# EAGLE board VL6180_Sensor-Panel-v10 (EAGLE 6.5.0)
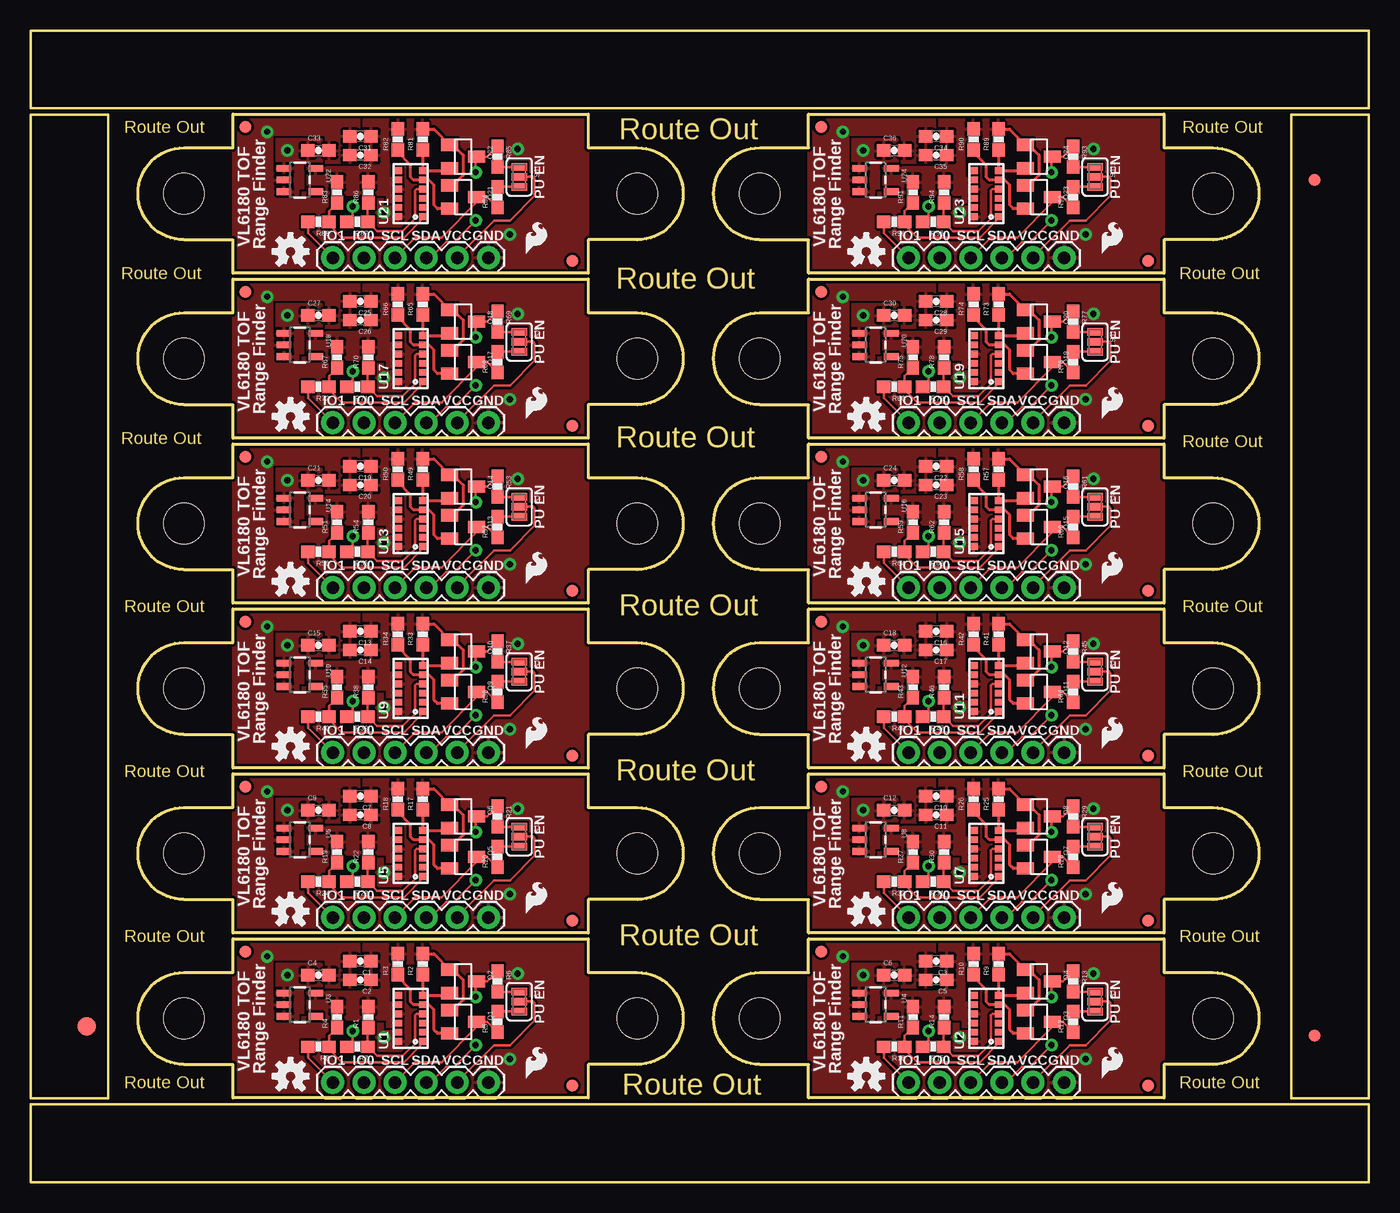
[diagram p0: board, top side]
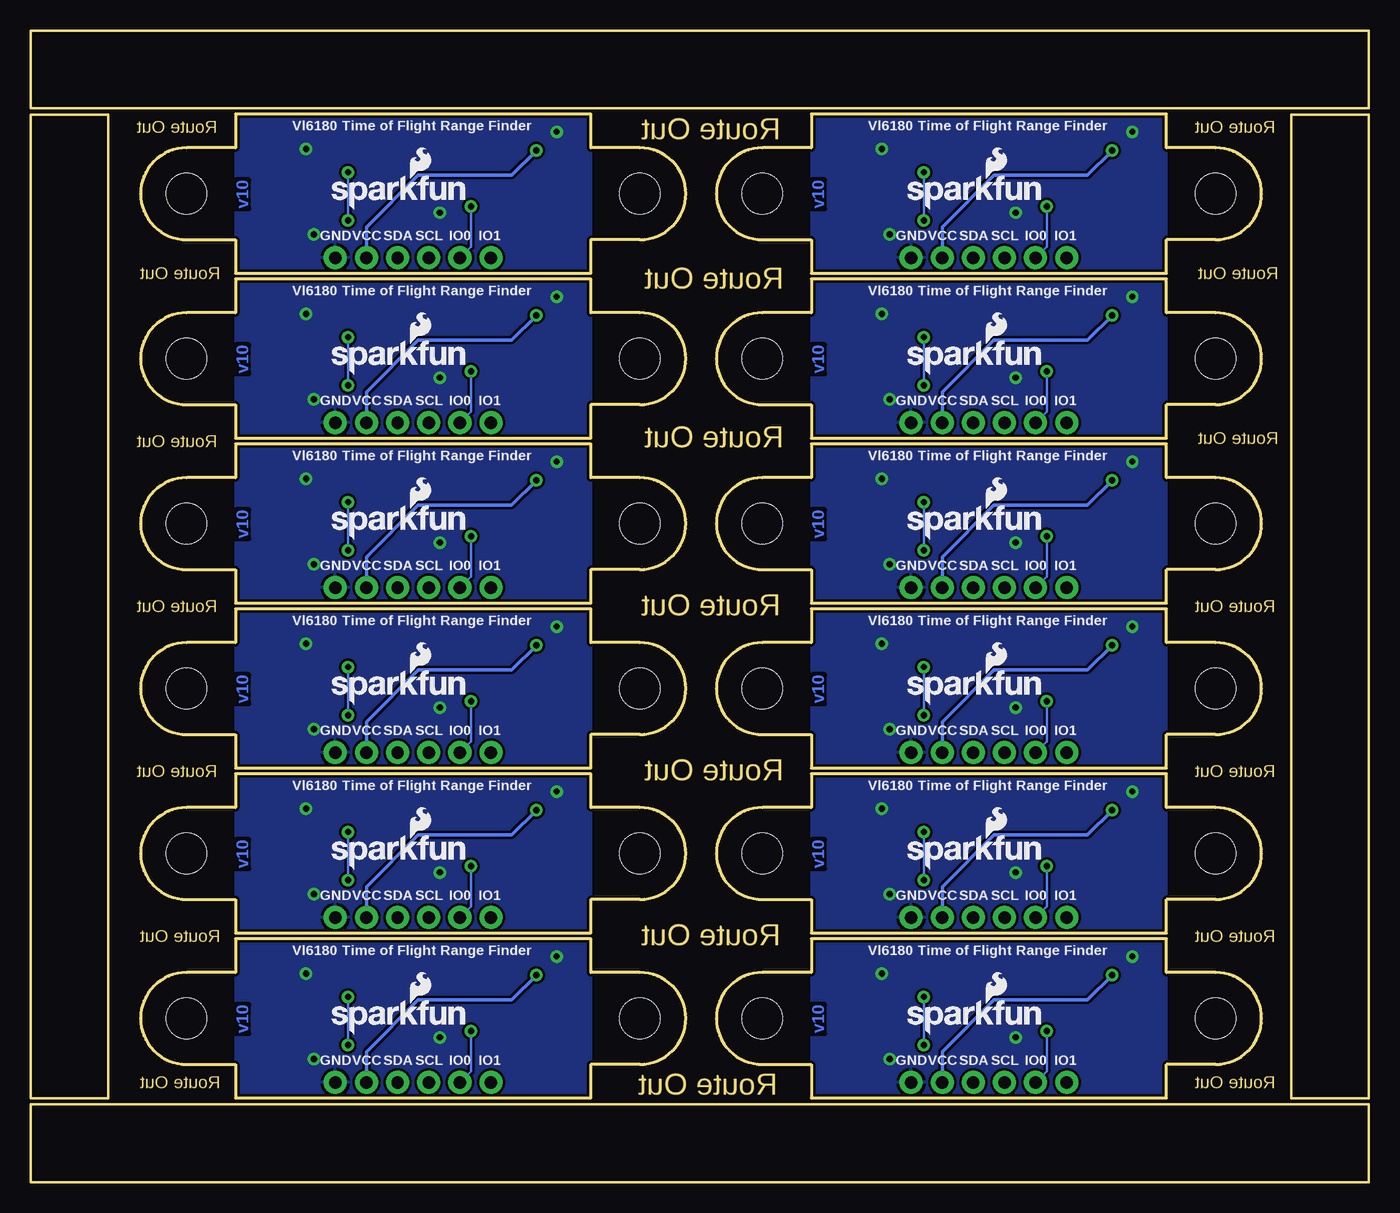
[diagram p1: board, bottom side, seen from below]

Size 109.22 x 93.98 mm. Coordinates in mm from the lower left corner, seen from the top.
Outline: 6.35,79.25 6.35,6.86 0,6.86 0,29.72
Outline: 79.25,0 0,0 0,6.35 29.72,6.35
Outline: 20.83,6.35 109.22,6.35 109.22,0 70.36,0
Outline: 109.22,79.25 109.22,6.86 102.87,6.86 102.87,29.72
Outline: 102.87,14.48 102.87,87.12 109.22,87.12 109.22,64.01
Outline: 0,14.48 0,87.12 6.35,87.12 6.35,64.01
Outline: 79.25,87.63 0,87.63 0,93.98 29.72,93.98
Outline: 28.7,93.98 109.22,93.98 109.22,87.63 78.23,87.63
Outline: 16.51,19.86 45.51,19.86 45.51,17.11 49.51,17.11 arc-180 49.51,9.61 45.51,9.61 45.51,6.86 16.51,6.86 16.51,9.61 12.51,9.61 arc-180 12.51,17.11 16.51,17.11 16.51,19.86
Outline: 63.5,19.86 92.5,19.86 92.5,17.11 96.5,17.11 arc-180 96.5,9.61 92.5,9.61 92.5,6.86 63.5,6.86 63.5,9.61 59.5,9.61 arc-180 59.5,17.11 63.5,17.11 63.5,19.86
Outline: 16.51,33.32 45.51,33.32 45.51,30.57 49.51,30.57 arc-180 49.51,23.07 45.51,23.07 45.51,20.32 16.51,20.32 16.51,23.07 12.51,23.07 arc-180 12.51,30.57 16.51,30.57 16.51,33.32
Outline: 63.5,33.32 92.5,33.32 92.5,30.57 96.5,30.57 arc-180 96.5,23.07 92.5,23.07 92.5,20.32 63.5,20.32 63.5,23.07 59.5,23.07 arc-180 59.5,30.57 63.5,30.57 63.5,33.32
Outline: 16.51,46.78 45.51,46.78 45.51,44.03 49.51,44.03 arc-180 49.51,36.53 45.51,36.53 45.51,33.78 16.51,33.78 16.51,36.53 12.51,36.53 arc-180 12.51,44.03 16.51,44.03 16.51,46.78
Outline: 63.5,46.78 92.5,46.78 92.5,44.03 96.5,44.03 arc-180 96.5,36.53 92.5,36.53 92.5,33.78 63.5,33.78 63.5,36.53 59.5,36.53 arc-180 59.5,44.03 63.5,44.03 63.5,46.78
Outline: 16.51,60.24 45.51,60.24 45.51,57.49 49.51,57.49 arc-180 49.51,49.99 45.51,49.99 45.51,47.24 16.51,47.24 16.51,49.99 12.51,49.99 arc-180 12.51,57.49 16.51,57.49 16.51,60.24
Outline: 63.5,60.24 92.5,60.24 92.5,57.49 96.5,57.49 arc-180 96.5,49.99 92.5,49.99 92.5,47.24 63.5,47.24 63.5,49.99 59.5,49.99 arc-180 59.5,57.49 63.5,57.49 63.5,60.24
Outline: 16.51,73.71 45.51,73.71 45.51,70.96 49.51,70.96 arc-180 49.51,63.46 45.51,63.46 45.51,60.71 16.51,60.71 16.51,63.46 12.51,63.46 arc-180 12.51,70.96 16.51,70.96 16.51,73.71
Outline: 63.5,73.71 92.5,73.71 92.5,70.96 96.5,70.96 arc-180 96.5,63.46 92.5,63.46 92.5,60.71 63.5,60.71 63.5,63.46 59.5,63.46 arc-180 59.5,70.96 63.5,70.96 63.5,73.71
Outline: 16.51,87.17 45.51,87.17 45.51,84.42 49.51,84.42 arc-180 49.51,76.92 45.51,76.92 45.51,74.17 16.51,74.17 16.51,76.92 12.51,76.92 arc-180 12.51,84.42 16.51,84.42 16.51,87.17
Outline: 63.5,87.17 92.5,87.17 92.5,84.42 96.5,84.42 arc-180 96.5,76.92 92.5,76.92 92.5,74.17 63.5,74.17 63.5,76.92 59.5,76.92 arc-180 59.5,84.42 63.5,84.42 63.5,87.17
Copper layers (1*16): Top 0.035mm / dielectric 1.5mm / Bottom 0.035mm
Design rules "SparkFun-2-layer": minimum track width 7mil, minimum drill 15mil, track to track 8mil, track to pad 8mil, pad to pad 8mil, via to via 8mil, smd to smd 8mil, copper to edge 8mil, drill to drill 8mil, minimum pad ring 12mil, minimum via ring 10mil, stop-mask expansion 4mil, vias tented up to drill 20mil, thermal gap 10mil

## Footprints (pad centres in the part's own frame; a part is rotated, then mirrored left to right if it is on the bottom)
0603-CAP = smd 1.1 x 1: 1 -0.85,0; 2 0.85,0
FIDUCIAL-1.5X3 = smd 1.5 x 1.5: 1 0,0
FIDUCIAL-1X2 = smd 1 x 1: 1 0,0
1X06 = drill 1.016 pad 1.88: 1 0,0; 2 2.54,0; 3 5.08,0; 4 7.62,0; 5 10.16,0; 6 12.7,0
SOT23 = smd 1 x 1.4: 1 -0.95,-1.1; 2 0.95,-1.1; 3 0,1.1
0603-RES = smd 1.1 x 1: 1 -0.85,0; 2 0.85,0
PAD-JUMPER-3-NC_BY_PASTE_YES_SILK_FULL_BOX = smd 0.635 x 1.27: 1 -0.813,0; 2 0,0; 3 0.813,0
STAND-OFF = hole 3.302: 0,0
VL6180 = smd 0.55 x 0.6: 1 -1.875,-1; 2 -1.125,-1; 3 -0.375,-1; 4 0.375,-1; 5 1.125,-1; 6 1.875,-1; 7 1.875,1; 8 1.125,1; 9 0.375,1; 10 -0.375,1; 11 -1.125,1; 12 -1.875,1
SOT23-5 = smd 0.55 x 1.2: 1 -0.95,-1.3; 2 0,-1.3; 3 0.95,-1.3; 4 0.95,1.3; 5 -0.95,1.3

## Placement (x,y rotation side)
C1  4.7uF  [0603-CAP]  26.92,18.03 180 top
C2  0.1uF  [0603-CAP]  26.92,16.51 180 top
C3  4.7uF  [0603-CAP]  73.91,18.03 180 top
C4  0.1uF  [0603-CAP]  23.5,16.89 0 top
C5  0.1uF  [0603-CAP]  73.91,16.51 180 top
C6  0.1uF  [0603-CAP]  70.48,16.89 0 top
C7  4.7uF  [0603-CAP]  26.92,31.5 180 top
C8  0.1uF  [0603-CAP]  26.92,29.97 180 top
C9  0.1uF  [0603-CAP]  23.5,30.35 0 top
C10  4.7uF  [0603-CAP]  73.91,31.5 180 top
C11  0.1uF  [0603-CAP]  73.91,29.97 180 top
C12  0.1uF  [0603-CAP]  70.48,30.35 0 top
C13  4.7uF  [0603-CAP]  26.92,44.96 180 top
C14  0.1uF  [0603-CAP]  26.92,43.43 180 top
C15  0.1uF  [0603-CAP]  23.5,43.81 0 top
C16  4.7uF  [0603-CAP]  73.91,44.96 180 top
C17  0.1uF  [0603-CAP]  73.91,43.43 180 top
C18  0.1uF  [0603-CAP]  70.48,43.81 0 top
C19  4.7uF  [0603-CAP]  26.92,58.42 180 top
C20  0.1uF  [0603-CAP]  26.92,56.9 180 top
C21  0.1uF  [0603-CAP]  23.5,57.28 0 top
C22  4.7uF  [0603-CAP]  73.91,58.42 180 top
C23  0.1uF  [0603-CAP]  73.91,56.9 180 top
C24  0.1uF  [0603-CAP]  70.48,57.28 0 top
C25  4.7uF  [0603-CAP]  26.92,71.88 180 top
C26  0.1uF  [0603-CAP]  26.92,70.36 180 top
C27  0.1uF  [0603-CAP]  23.5,70.74 0 top
C28  4.7uF  [0603-CAP]  73.91,71.88 180 top
C29  0.1uF  [0603-CAP]  73.91,70.36 180 top
C30  0.1uF  [0603-CAP]  70.48,70.74 0 top
C31  4.7uF  [0603-CAP]  26.92,85.34 180 top
C32  0.1uF  [0603-CAP]  26.92,83.82 180 top
C33  0.1uF  [0603-CAP]  23.5,84.2 0 top
C34  4.7uF  [0603-CAP]  73.91,85.34 180 top
C35  0.1uF  [0603-CAP]  73.91,83.82 180 top
C36  0.1uF  [0603-CAP]  70.48,84.2 0 top
E$1  [FIDUCIAL-1.5X3]  4.57,12.7 0 top
E$4  [FIDUCIAL-1X2]  104.78,11.94 0 top
E$5  [FIDUCIAL-1X2]  104.78,81.79 180 top
FID1  FIDUCIAL1X2  [FIDUCIAL-1X2]  17.53,18.8 0 top
FID2  FIDUCIAL1X2  [FIDUCIAL-1X2]  44.2,7.87 0 top
FID3  FIDUCIAL1X2  [FIDUCIAL-1X2]  64.52,18.8 0 top
FID4  FIDUCIAL1X2  [FIDUCIAL-1X2]  91.19,7.87 0 top
FID5  FIDUCIAL1X2  [FIDUCIAL-1X2]  17.53,32.26 0 top
FID6  FIDUCIAL1X2  [FIDUCIAL-1X2]  44.2,21.34 0 top
FID7  FIDUCIAL1X2  [FIDUCIAL-1X2]  64.52,32.26 0 top
FID8  FIDUCIAL1X2  [FIDUCIAL-1X2]  91.19,21.34 0 top
FID9  FIDUCIAL1X2  [FIDUCIAL-1X2]  17.53,45.72 0 top
FID10  FIDUCIAL1X2  [FIDUCIAL-1X2]  44.2,34.8 0 top
FID11  FIDUCIAL1X2  [FIDUCIAL-1X2]  64.52,45.72 0 top
FID12  FIDUCIAL1X2  [FIDUCIAL-1X2]  91.19,34.8 0 top
FID13  FIDUCIAL1X2  [FIDUCIAL-1X2]  17.53,59.18 0 top
FID14  FIDUCIAL1X2  [FIDUCIAL-1X2]  44.2,48.26 0 top
FID15  FIDUCIAL1X2  [FIDUCIAL-1X2]  64.52,59.18 0 top
FID16  FIDUCIAL1X2  [FIDUCIAL-1X2]  91.19,48.26 0 top
FID17  FIDUCIAL1X2  [FIDUCIAL-1X2]  17.53,72.64 0 top
FID18  FIDUCIAL1X2  [FIDUCIAL-1X2]  44.2,61.72 0 top
FID19  FIDUCIAL1X2  [FIDUCIAL-1X2]  64.52,72.64 0 top
FID20  FIDUCIAL1X2  [FIDUCIAL-1X2]  91.19,61.72 0 top
FID21  FIDUCIAL1X2  [FIDUCIAL-1X2]  17.53,86.11 0 top
FID22  FIDUCIAL1X2  [FIDUCIAL-1X2]  44.2,75.18 0 top
FID23  FIDUCIAL1X2  [FIDUCIAL-1X2]  64.52,86.11 0 top
FID24  FIDUCIAL1X2  [FIDUCIAL-1X2]  91.19,75.18 0 top
JP1  [1X06]  37.36,8.13 180 top
JP2  [1X06]  84.35,8.13 180 top
JP3  [1X06]  37.36,21.59 180 top
JP4  [1X06]  84.35,21.59 180 top
JP5  [1X06]  37.36,35.05 180 top
JP6  [1X06]  84.35,35.05 180 top
JP7  [1X06]  37.36,48.51 180 top
JP8  [1X06]  84.35,48.51 180 top
JP9  [1X06]  37.36,61.98 180 top
JP10  [1X06]  84.35,61.98 180 top
JP11  [1X06]  37.36,75.44 180 top
JP12  [1X06]  84.35,75.44 180 top
LOGO1  SFE_LOGO_NAME_FLAME.1_INCH  [SFE_LOGO_NAME_FLAME_.1]  38.1,11.94 0 bottom
LOGO2  OSHW-LOGOS  [OSHW-LOGO-S]  21.21,8.64 0 top
LOGO3  SFE_LOGO_NAME_FLAME.1_INCH  [SFE_LOGO_NAME_FLAME_.1]  85.09,11.94 0 bottom
LOGO4  OSHW-LOGOS  [OSHW-LOGO-S]  68.2,8.64 0 top
LOGO5  SFE_LOGO_NAME_FLAME.1_INCH  [SFE_LOGO_NAME_FLAME_.1]  38.1,25.4 0 bottom
LOGO6  OSHW-LOGOS  [OSHW-LOGO-S]  21.21,22.1 0 top
LOGO7  SFE_LOGO_NAME_FLAME.1_INCH  [SFE_LOGO_NAME_FLAME_.1]  85.09,25.4 0 bottom
LOGO8  OSHW-LOGOS  [OSHW-LOGO-S]  68.2,22.1 0 top
LOGO9  SFE_LOGO_NAME_FLAME.1_INCH  [SFE_LOGO_NAME_FLAME_.1]  38.1,38.86 0 bottom
LOGO10  OSHW-LOGOS  [OSHW-LOGO-S]  21.21,35.56 0 top
LOGO11  SFE_LOGO_NAME_FLAME.1_INCH  [SFE_LOGO_NAME_FLAME_.1]  85.09,38.86 0 bottom
LOGO12  OSHW-LOGOS  [OSHW-LOGO-S]  68.2,35.56 0 top
LOGO13  SFE_LOGO_NAME_FLAME.1_INCH  [SFE_LOGO_NAME_FLAME_.1]  38.1,52.32 0 bottom
LOGO14  OSHW-LOGOS  [OSHW-LOGO-S]  21.21,49.02 0 top
LOGO15  SFE_LOGO_NAME_FLAME.1_INCH  [SFE_LOGO_NAME_FLAME_.1]  85.09,52.32 0 bottom
LOGO16  OSHW-LOGOS  [OSHW-LOGO-S]  68.2,49.02 0 top
LOGO17  SFE_LOGO_NAME_FLAME.1_INCH  [SFE_LOGO_NAME_FLAME_.1]  38.1,65.79 0 bottom
LOGO18  OSHW-LOGOS  [OSHW-LOGO-S]  21.21,62.48 0 top
LOGO19  SFE_LOGO_NAME_FLAME.1_INCH  [SFE_LOGO_NAME_FLAME_.1]  85.09,65.79 0 bottom
LOGO20  OSHW-LOGOS  [OSHW-LOGO-S]  68.2,62.48 0 top
LOGO21  SFE_LOGO_NAME_FLAME.1_INCH  [SFE_LOGO_NAME_FLAME_.1]  38.1,79.25 0 bottom
LOGO22  OSHW-LOGOS  [OSHW-LOGO-S]  21.21,75.95 0 top
LOGO23  SFE_LOGO_NAME_FLAME.1_INCH  [SFE_LOGO_NAME_FLAME_.1]  85.09,79.25 0 bottom
LOGO24  OSHW-LOGOS  [OSHW-LOGO-S]  68.2,75.95 0 top
Q1  BSS138  [SOT23]  35.31,13.08 270 top
Q2  BSS138  [SOT23]  35.31,16.38 270 top
Q3  BSS138  [SOT23]  82.3,13.08 270 top
Q4  BSS138  [SOT23]  82.3,16.38 270 top
Q5  BSS138  [SOT23]  35.31,26.54 270 top
Q6  BSS138  [SOT23]  35.31,29.84 270 top
Q7  BSS138  [SOT23]  82.3,26.54 270 top
Q8  BSS138  [SOT23]  82.3,29.84 270 top
Q9  BSS138  [SOT23]  35.31,40.01 270 top
Q10  BSS138  [SOT23]  35.31,43.31 270 top
Q11  BSS138  [SOT23]  82.3,40.01 270 top
Q12  BSS138  [SOT23]  82.3,43.31 270 top
Q13  BSS138  [SOT23]  35.31,53.47 270 top
Q14  BSS138  [SOT23]  35.31,56.77 270 top
Q15  BSS138  [SOT23]  82.3,53.47 270 top
Q16  BSS138  [SOT23]  82.3,56.77 270 top
Q17  BSS138  [SOT23]  35.31,66.93 270 top
Q18  BSS138  [SOT23]  35.31,70.23 270 top
Q19  BSS138  [SOT23]  82.3,66.93 270 top
Q20  BSS138  [SOT23]  82.3,70.23 270 top
Q21  BSS138  [SOT23]  35.31,80.39 270 top
Q22  BSS138  [SOT23]  35.31,83.69 270 top
Q23  BSS138  [SOT23]  82.3,80.39 270 top
Q24  BSS138  [SOT23]  82.3,83.69 270 top
R1  47k  [0603-RES]  27.56,13.46 90 top
R2  2.2k  [0603-RES]  32,17.78 90 top
R3  2.2k  [0603-RES]  29.97,17.78 90 top
R4  47k  [0603-RES]  25.02,13.46 90 top
R5  2.2k  [0603-RES]  38.1,13.08 90 top
R6  2.2k  [0603-RES]  38.1,16.38 270 top
R7  10k  [0603-RES]  26.67,11.05 180 top
R8  10k  [0603-RES]  23.5,11.05 180 top
R9  2.2k  [0603-RES]  78.99,17.78 90 top
R10  2.2k  [0603-RES]  76.96,17.78 90 top
R11  47k  [0603-RES]  72.01,13.46 90 top
R12  2.2k  [0603-RES]  85.09,13.08 90 top
R13  2.2k  [0603-RES]  85.09,16.38 270 top
R14  47k  [0603-RES]  74.55,13.46 90 top
R15  10k  [0603-RES]  73.66,11.05 180 top
R16  10k  [0603-RES]  70.48,11.05 180 top
R17  2.2k  [0603-RES]  32,31.24 90 top
R18  2.2k  [0603-RES]  29.97,31.24 90 top
R19  47k  [0603-RES]  25.02,26.92 90 top
R20  2.2k  [0603-RES]  38.1,26.54 90 top
R21  2.2k  [0603-RES]  38.1,29.84 270 top
R22  47k  [0603-RES]  27.56,26.92 90 top
R23  10k  [0603-RES]  26.67,24.51 180 top
R24  10k  [0603-RES]  23.5,24.51 180 top
R25  2.2k  [0603-RES]  78.99,31.24 90 top
R26  2.2k  [0603-RES]  76.96,31.24 90 top
R27  47k  [0603-RES]  72.01,26.92 90 top
R28  2.2k  [0603-RES]  85.09,26.54 90 top
R29  2.2k  [0603-RES]  85.09,29.84 270 top
R30  47k  [0603-RES]  74.55,26.92 90 top
R31  10k  [0603-RES]  73.66,24.51 180 top
R32  10k  [0603-RES]  70.48,24.51 180 top
R33  2.2k  [0603-RES]  32,44.7 90 top
R34  2.2k  [0603-RES]  29.97,44.7 90 top
R35  47k  [0603-RES]  25.02,40.39 90 top
R36  2.2k  [0603-RES]  38.1,40.01 90 top
R37  2.2k  [0603-RES]  38.1,43.31 270 top
R38  47k  [0603-RES]  27.56,40.39 90 top
R39  10k  [0603-RES]  26.67,37.97 180 top
R40  10k  [0603-RES]  23.5,37.97 180 top
R41  2.2k  [0603-RES]  78.99,44.7 90 top
R42  2.2k  [0603-RES]  76.96,44.7 90 top
R43  47k  [0603-RES]  72.01,40.39 90 top
R44  2.2k  [0603-RES]  85.09,40.01 90 top
R45  2.2k  [0603-RES]  85.09,43.31 270 top
R46  47k  [0603-RES]  74.55,40.39 90 top
R47  10k  [0603-RES]  73.66,37.97 180 top
R48  10k  [0603-RES]  70.48,37.97 180 top
R49  2.2k  [0603-RES]  32,58.17 90 top
R50  2.2k  [0603-RES]  29.97,58.17 90 top
R51  47k  [0603-RES]  25.02,53.85 90 top
R52  2.2k  [0603-RES]  38.1,53.47 90 top
R53  2.2k  [0603-RES]  38.1,56.77 270 top
R54  47k  [0603-RES]  27.56,53.85 90 top
R55  10k  [0603-RES]  26.67,51.44 180 top
R56  10k  [0603-RES]  23.5,51.44 180 top
R57  2.2k  [0603-RES]  78.99,58.17 90 top
R58  2.2k  [0603-RES]  76.96,58.17 90 top
R59  47k  [0603-RES]  72.01,53.85 90 top
R60  2.2k  [0603-RES]  85.09,53.47 90 top
R61  2.2k  [0603-RES]  85.09,56.77 270 top
R62  47k  [0603-RES]  74.55,53.85 90 top
R63  10k  [0603-RES]  73.66,51.44 180 top
R64  10k  [0603-RES]  70.48,51.44 180 top
R65  2.2k  [0603-RES]  32,71.63 90 top
R66  2.2k  [0603-RES]  29.97,71.63 90 top
R67  47k  [0603-RES]  25.02,67.31 90 top
R68  2.2k  [0603-RES]  38.1,66.93 90 top
R69  2.2k  [0603-RES]  38.1,70.23 270 top
R70  47k  [0603-RES]  27.56,67.31 90 top
R71  10k  [0603-RES]  26.67,64.9 180 top
R72  10k  [0603-RES]  23.5,64.9 180 top
R73  2.2k  [0603-RES]  78.99,71.63 90 top
R74  2.2k  [0603-RES]  76.96,71.63 90 top
R75  47k  [0603-RES]  72.01,67.31 90 top
R76  2.2k  [0603-RES]  85.09,66.93 90 top
R77  2.2k  [0603-RES]  85.09,70.23 270 top
R78  47k  [0603-RES]  74.55,67.31 90 top
R79  10k  [0603-RES]  73.66,64.9 180 top
R80  10k  [0603-RES]  70.48,64.9 180 top
R81  2.2k  [0603-RES]  32,85.09 90 top
R82  2.2k  [0603-RES]  29.97,85.09 90 top
R83  47k  [0603-RES]  25.02,80.77 90 top
R84  2.2k  [0603-RES]  38.1,80.39 90 top
R85  2.2k  [0603-RES]  38.1,83.69 270 top
R86  47k  [0603-RES]  27.56,80.77 90 top
R87  10k  [0603-RES]  26.67,78.36 180 top
R88  10k  [0603-RES]  23.5,78.36 180 top
R89  2.2k  [0603-RES]  78.99,85.09 90 top
R90  2.2k  [0603-RES]  76.96,85.09 90 top
R91  47k  [0603-RES]  72.01,80.77 90 top
R92  2.2k  [0603-RES]  85.09,80.39 90 top
R93  2.2k  [0603-RES]  85.09,83.69 270 top
R94  47k  [0603-RES]  74.55,80.77 90 top
R95  10k  [0603-RES]  73.66,78.36 180 top
R96  10k  [0603-RES]  70.48,78.36 180 top
SJ1  [PAD-JUMPER-3-NC_BY_PASTE_YES_SILK_FULL_BOX]  39.88,14.73 270 top
SJ2  [PAD-JUMPER-3-NC_BY_PASTE_YES_SILK_FULL_BOX]  86.87,14.73 270 top
SJ3  [PAD-JUMPER-3-NC_BY_PASTE_YES_SILK_FULL_BOX]  39.88,28.19 270 top
SJ4  [PAD-JUMPER-3-NC_BY_PASTE_YES_SILK_FULL_BOX]  86.87,28.19 270 top
SJ5  [PAD-JUMPER-3-NC_BY_PASTE_YES_SILK_FULL_BOX]  39.88,41.66 270 top
SJ6  [PAD-JUMPER-3-NC_BY_PASTE_YES_SILK_FULL_BOX]  86.87,41.66 270 top
SJ7  [PAD-JUMPER-3-NC_BY_PASTE_YES_SILK_FULL_BOX]  39.88,55.12 270 top
SJ8  [PAD-JUMPER-3-NC_BY_PASTE_YES_SILK_FULL_BOX]  86.87,55.12 270 top
SJ9  [PAD-JUMPER-3-NC_BY_PASTE_YES_SILK_FULL_BOX]  39.88,68.58 270 top
SJ10  [PAD-JUMPER-3-NC_BY_PASTE_YES_SILK_FULL_BOX]  86.87,68.58 270 top
SJ11  [PAD-JUMPER-3-NC_BY_PASTE_YES_SILK_FULL_BOX]  39.88,82.04 270 top
SJ12  [PAD-JUMPER-3-NC_BY_PASTE_YES_SILK_FULL_BOX]  86.87,82.04 270 top
STANDOFF1  STAND-OFF  [STAND-OFF]  12.51,13.36 0 top
STANDOFF2  STAND-OFF  [STAND-OFF]  49.51,13.36 0 top
STANDOFF3  STAND-OFF  [STAND-OFF]  59.5,13.36 0 top
STANDOFF4  STAND-OFF  [STAND-OFF]  96.5,13.36 0 top
STANDOFF5  STAND-OFF  [STAND-OFF]  12.51,26.82 0 top
STANDOFF6  STAND-OFF  [STAND-OFF]  49.51,26.82 0 top
STANDOFF7  STAND-OFF  [STAND-OFF]  59.5,26.82 0 top
STANDOFF8  STAND-OFF  [STAND-OFF]  96.5,26.82 0 top
STANDOFF9  STAND-OFF  [STAND-OFF]  12.51,40.28 0 top
STANDOFF10  STAND-OFF  [STAND-OFF]  49.51,40.28 0 top
STANDOFF11  STAND-OFF  [STAND-OFF]  59.5,40.28 0 top
STANDOFF12  STAND-OFF  [STAND-OFF]  96.5,40.28 0 top
STANDOFF13  STAND-OFF  [STAND-OFF]  12.51,53.74 0 top
STANDOFF14  STAND-OFF  [STAND-OFF]  49.51,53.74 0 top
STANDOFF15  STAND-OFF  [STAND-OFF]  59.5,53.74 0 top
STANDOFF16  STAND-OFF  [STAND-OFF]  96.5,53.74 0 top
STANDOFF17  STAND-OFF  [STAND-OFF]  12.51,67.21 0 top
STANDOFF18  STAND-OFF  [STAND-OFF]  49.51,67.21 0 top
STANDOFF19  STAND-OFF  [STAND-OFF]  59.5,67.21 0 top
STANDOFF20  STAND-OFF  [STAND-OFF]  96.5,67.21 0 top
STANDOFF21  STAND-OFF  [STAND-OFF]  12.51,80.67 0 top
STANDOFF22  STAND-OFF  [STAND-OFF]  49.51,80.67 0 top
STANDOFF23  STAND-OFF  [STAND-OFF]  59.5,80.67 0 top
STANDOFF24  STAND-OFF  [STAND-OFF]  96.5,80.67 0 top
U1  VL6180  [VL6180]  31.01,13.36 90 top
U2  VL6180  [VL6180]  78,13.36 90 top
U3  MIC5219 3.3V  [SOT23-5]  21.97,14.48 270 top
U4  MIC5219 3.3V  [SOT23-5]  68.96,14.48 270 top
U5  VL6180  [VL6180]  31.01,26.82 90 top
U6  MIC5219 3.3V  [SOT23-5]  21.97,27.94 270 top
U7  VL6180  [VL6180]  78,26.82 90 top
U8  MIC5219 3.3V  [SOT23-5]  68.96,27.94 270 top
U9  VL6180  [VL6180]  31.01,40.28 90 top
U10  MIC5219 3.3V  [SOT23-5]  21.97,41.4 270 top
U11  VL6180  [VL6180]  78,40.28 90 top
U12  MIC5219 3.3V  [SOT23-5]  68.96,41.4 270 top
U13  VL6180  [VL6180]  31.01,53.74 90 top
U14  MIC5219 3.3V  [SOT23-5]  21.97,54.86 270 top
U15  VL6180  [VL6180]  78,53.74 90 top
U16  MIC5219 3.3V  [SOT23-5]  68.96,54.86 270 top
U17  VL6180  [VL6180]  31.01,67.21 90 top
U18  MIC5219 3.3V  [SOT23-5]  21.97,68.33 270 top
U19  VL6180  [VL6180]  78,67.21 90 top
U20  MIC5219 3.3V  [SOT23-5]  68.96,68.33 270 top
U21  VL6180  [VL6180]  31.01,80.67 90 top
U22  MIC5219 3.3V  [SOT23-5]  21.97,81.79 270 top
U23  VL6180  [VL6180]  78,80.67 90 top
U24  MIC5219 3.3V  [SOT23-5]  68.96,81.79 270 top
U$1  [SFE_LOGO_FLAME_.1]  87.12,8.13 0 top
U$2  [SFE_LOGO_FLAME_.1]  40.13,8.13 0 top
U$3  [SFE_LOGO_FLAME_.1]  40.13,21.59 0 top
U$4  [SFE_LOGO_FLAME_.1]  87.12,21.59 0 top
U$5  [SFE_LOGO_FLAME_.1]  40.13,35.05 0 top
U$6  [SFE_LOGO_FLAME_.1]  87.12,35.05 0 top
U$7  [SFE_LOGO_FLAME_.1]  40.13,48.51 0 top
U$8  [SFE_LOGO_FLAME_.1]  87.12,48.51 0 top
U$9  [SFE_LOGO_FLAME_.1]  40.13,61.98 0 top
U$10  [SFE_LOGO_FLAME_.1]  87.12,61.98 0 top
U$11  [SFE_LOGO_FLAME_.1]  40.13,75.44 0 top
U$12  [SFE_LOGO_FLAME_.1]  87.12,75.44 0 top

## Library data of the parts
C1 C3 C7 C10 C13 C16 C19 C22 C25 C28 C31 C34 = SparkFun-Capacitors; PROD_ID: CAP-08280
C2 C4-C6 C8 C9 C11 C12 C14 C15 C17 C18 C20 C21 C23 C24 C26 C27 C29 C30 C32 C33 C35 C36 = SparkFun-Capacitors; PROD_ID: CAP-00810
E$1 = SparkFun-Retired
E$4 E$5 FID1-FID24 LOGO1-LOGO24 U$1-U$12 = SparkFun-Aesthetics
JP1-JP12 = SparkFun-Connectors
Q1-Q24 = SparkFun-DiscreteSemi; PROD_ID: TRANS-00830
R1 R4 R11 R14 R19 R22 R27 R30 R35 R38 R43 R46 R51 R54 R59 R62 R67 R70 R75 R78 R83 R86 R91 R94 = SparkFun-Resistors; PROD_ID: RES-07871
R2 R3 R5 R6 R9 R10 R12 R13 R17 R18 R20 R21 R25 R26 R28 R29 R33 R34 R36 R37 R41 R42 R44 R45 R49 R50 R52 R53 R57 R58 R60 R61 R65 R66 R68 R69 R73 R74 R76 R77 R81 R82 R84 R85 R89 R90 R92 R93 = SparkFun-Resistors; PROD_ID: RES-08272
R7 R8 R15 R16 R23 R24 R31 R32 R39 R40 R47 R48 R55 R56 R63 R64 R71 R72 R79 R80 R87 R88 R95 R96 = SparkFun-Resistors; PROD_ID: RES-00824
SJ1-SJ12 = SparkFun-Passives
STANDOFF1-STANDOFF24 = SparkFun-Electromechanical
U1 U2 U5 U7 U9 U11 U13 U15 U17 U19 U21 U23 = VL6180; PROD_ID: IC-12007
U3 U4 U6 U8 U10 U12 U14 U16 U18 U20 U22 U24 = SparkFun-PowerIC; PROD_ID: VREG-09872

## Nets
2.8V: C1.1 C2.1 Q1.1 Q2.1 R1.2 R2.2 R3.2 R4.2 U1.8 U1.10 U3.5
2.8V1: C3.1 C5.1 Q3.1 Q4.1 R9.2 R10.2 R11.2 R14.2 U2.8 U2.10 U4.5
2.8V2: C7.1 C8.1 Q5.1 Q6.1 R17.2 R18.2 R19.2 R22.2 U5.8 U5.10 U6.5
2.8V3: C10.1 C11.1 Q7.1 Q8.1 R25.2 R26.2 R27.2 R30.2 U7.8 U7.10 U8.5
2.8V4: C13.1 C14.1 Q9.1 Q10.1 R33.2 R34.2 R35.2 R38.2 U9.8 U9.10 U10.5
2.8V5: C16.1 C17.1 Q11.1 Q12.1 R41.2 R42.2 R43.2 R46.2 U11.8 U11.10 U12.5
2.8V6: C19.1 C20.1 Q13.1 Q14.1 R49.2 R50.2 R51.2 R54.2 U13.8 U13.10 U14.5
2.8V7: C22.1 C23.1 Q15.1 Q16.1 R57.2 R58.2 R59.2 R62.2 U15.8 U15.10 U16.5
2.8V8: C25.1 C26.1 Q17.1 Q18.1 R65.2 R66.2 R67.2 R70.2 U17.8 U17.10 U18.5
2.8V9: C28.1 C29.1 Q19.1 Q20.1 R73.2 R74.2 R75.2 R78.2 U19.8 U19.10 U20.5
2.8V10: C31.1 C32.1 Q21.1 Q22.1 R81.2 R82.2 R83.2 R86.2 U21.8 U21.10 U22.5
2.8V11: C34.1 C35.1 Q23.1 Q24.1 R89.2 R90.2 R91.2 R94.2 U23.8 U23.10 U24.5
GND: C1.2 C2.2 C4.2 JP1.1 U1.9 U1.12 U3.2
GND1: C3.2 C5.2 C6.2 JP2.1 U2.9 U2.12 U4.2
GND2: C7.2 C8.2 C9.2 JP3.1 U5.9 U5.12 U6.2
GND3: C10.2 C11.2 C12.2 JP4.1 U7.9 U7.12 U8.2
GND4: C13.2 C14.2 C15.2 JP5.1 U9.9 U9.12 U10.2
GND5: C16.2 C17.2 C18.2 JP6.1 U11.9 U11.12 U12.2
GND6: C19.2 C20.2 C21.2 JP7.1 U13.9 U13.12 U14.2
GND7: C22.2 C23.2 C24.2 JP8.1 U15.9 U15.12 U16.2
GND8: C25.2 C26.2 C27.2 JP9.1 U17.9 U17.12 U18.2
GND9: C28.2 C29.2 C30.2 JP10.1 U19.9 U19.12 U20.2
GND10: C31.2 C32.2 C33.2 JP11.1 U21.9 U21.12 U22.2
GND11: C34.2 C35.2 C36.2 JP12.1 U23.9 U23.12 U24.2
GPIO0: JP1.5 R7.2
GPIO1: JP1.6 R8.2
GPIO2: JP2.5 R15.2
GPIO3: JP2.6 R16.2
GPIO4: JP3.5 R23.2
GPIO5: JP3.6 R24.2
GPIO6: JP4.5 R31.2
GPIO7: JP4.6 R32.2
GPIO8: JP5.5 R39.2
GPIO9: JP5.6 R40.2
GPIO10: JP6.5 R47.2
GPIO11: JP6.6 R48.2
GPIO12: JP7.5 R55.2
GPIO13: JP7.6 R56.2
GPIO14: JP8.5 R63.2
GPIO15: JP8.6 R64.2
GPIO16: JP9.5 R71.2
GPIO17: JP9.6 R72.2
GPIO18: JP10.5 R79.2
GPIO19: JP10.6 R80.2
GPIO20: JP11.5 R87.2
GPIO21: JP11.6 R88.2
GPIO22: JP12.5 R95.2
GPIO23: JP12.6 R96.2
N$1: R13.2 SJ2.1
N$2: R6.2 SJ1.1
N$3: R5.2 SJ1.3
N$4: R12.2 SJ2.3
N$5: R14.1 R15.1 U2.4
N$6: R11.1 R16.1 U2.1
N$7: R21.2 SJ3.1
N$8: R20.2 SJ3.3
N$9: R22.1 R23.1 U5.4
N$10: R19.1 R24.1 U5.1
N$11: R29.2 SJ4.1
N$12: R28.2 SJ4.3
N$13: R30.1 R31.1 U7.4
N$14: R27.1 R32.1 U7.1
N$15: R37.2 SJ5.1
N$16: R36.2 SJ5.3
N$17: R38.1 R39.1 U9.4
N$18: R35.1 R40.1 U9.1
N$19: R45.2 SJ6.1
N$20: R44.2 SJ6.3
N$21: R46.1 R47.1 U11.4
N$22: R43.1 R48.1 U11.1
N$23: R53.2 SJ7.1
N$24: R52.2 SJ7.3
N$25: R54.1 R55.1 U13.4
N$26: R51.1 R56.1 U13.1
N$27: R61.2 SJ8.1
N$28: R60.2 SJ8.3
N$29: R62.1 R63.1 U15.4
N$30: R59.1 R64.1 U15.1
N$31: R69.2 SJ9.1
N$32: R68.2 SJ9.3
N$33: R70.1 R71.1 U17.4
N$34: R67.1 R72.1 U17.1
N$35: R77.2 SJ10.1
N$36: R76.2 SJ10.3
N$37: R78.1 R79.1 U19.4
N$38: R75.1 R80.1 U19.1
N$39: R85.2 SJ11.1
N$40: R84.2 SJ11.3
N$41: R86.1 R87.1 U21.4
N$42: R83.1 R88.1 U21.1
N$43: R93.2 SJ12.1
N$44: R92.2 SJ12.3
N$45: R94.1 R95.1 U23.4
N$46: R91.1 R96.1 U23.1
N$100: R1.1 R7.1 U1.4
N$103: R4.1 R8.1 U1.1
SCL: JP1.4 Q1.3 R5.1
SCL1: JP2.4 Q3.3 R12.1
SCL2: JP3.4 Q5.3 R20.1
SCL3: JP4.4 Q7.3 R28.1
SCL4: JP5.4 Q9.3 R36.1
SCL5: JP6.4 Q11.3 R44.1
SCL6: JP7.4 Q13.3 R52.1
SCL7: JP8.4 Q15.3 R60.1
SCL8: JP9.4 Q17.3 R68.1
SCL9: JP10.4 Q19.3 R76.1
SCL10: JP11.4 Q21.3 R84.1
SCL11: JP12.4 Q23.3 R92.1
SCL_LV: Q1.2 R3.1 U1.5
SCL_LV1: Q3.2 R10.1 U2.5
SCL_LV2: Q5.2 R18.1 U5.5
SCL_LV3: Q7.2 R26.1 U7.5
SCL_LV4: Q9.2 R34.1 U9.5
SCL_LV5: Q11.2 R42.1 U11.5
SCL_LV6: Q13.2 R50.1 U13.5
SCL_LV7: Q15.2 R58.1 U15.5
SCL_LV8: Q17.2 R66.1 U17.5
SCL_LV9: Q19.2 R74.1 U19.5
SCL_LV10: Q21.2 R82.1 U21.5
SCL_LV11: Q23.2 R90.1 U23.5
SDA: JP1.3 Q2.3 R6.1
SDA1: JP2.3 Q4.3 R13.1
SDA2: JP3.3 Q6.3 R21.1
SDA3: JP4.3 Q8.3 R29.1
SDA4: JP5.3 Q10.3 R37.1
SDA5: JP6.3 Q12.3 R45.1
SDA6: JP7.3 Q14.3 R53.1
SDA7: JP8.3 Q16.3 R61.1
SDA8: JP9.3 Q18.3 R69.1
SDA9: JP10.3 Q20.3 R77.1
SDA10: JP11.3 Q22.3 R85.1
SDA11: JP12.3 Q24.3 R93.1
SDA_LV: Q2.2 R2.1 U1.6
SDA_LV1: Q4.2 R9.1 U2.6
SDA_LV2: Q6.2 R17.1 U5.6
SDA_LV3: Q8.2 R25.1 U7.6
SDA_LV4: Q10.2 R33.1 U9.6
SDA_LV5: Q12.2 R41.1 U11.6
SDA_LV6: Q14.2 R49.1 U13.6
SDA_LV7: Q16.2 R57.1 U15.6
SDA_LV8: Q18.2 R65.1 U17.6
SDA_LV9: Q20.2 R73.1 U19.6
SDA_LV10: Q22.2 R81.1 U21.6
SDA_LV11: Q24.2 R89.1 U23.6
VCC: C4.1 JP1.2 SJ1.2 U3.1 U3.3
VCC1: C6.1 JP2.2 SJ2.2 U4.1 U4.3
VCC2: C9.1 JP3.2 SJ3.2 U6.1 U6.3
VCC3: C12.1 JP4.2 SJ4.2 U8.1 U8.3
VCC4: C15.1 JP5.2 SJ5.2 U10.1 U10.3
VCC5: C18.1 JP6.2 SJ6.2 U12.1 U12.3
VCC6: C21.1 JP7.2 SJ7.2 U14.1 U14.3
VCC7: C24.1 JP8.2 SJ8.2 U16.1 U16.3
VCC8: C27.1 JP9.2 SJ9.2 U18.1 U18.3
VCC9: C30.1 JP10.2 SJ10.2 U20.1 U20.3
VCC10: C33.1 JP11.2 SJ11.2 U22.1 U22.3
VCC11: C36.1 JP12.2 SJ12.2 U24.1 U24.3

## Tracks (layer width: path | path; a pad name or v marks a point on that pad's centre or on a via)
2.8V
  Top 0.254: R2.2 32.91,18.63 Q2.1 34.48,17.33 35.31,16.51 35.31,14.86 34.48,14.03 Q1.1
  pour Top: 22.61,15.49 22.61,13.34 29.08,13.34 29.08,12.7 30.1,12.7 30.1,13.08 29.46,13.08 29.46,14.35 30.1,14.35 30.1,14.61 29.21,14.61 29.21,17.65 29.46,17.91 32.64,17.91 32.64,19.43 27.18,19.43 27.18,15.49
2.8V1
  Top 0.254: R9.2 79.9,18.63 Q4.1 81.47,17.33 82.3,16.51 82.3,14.86 81.47,14.03 Q3.1
  pour Top: 69.6,15.49 69.6,13.34 76.07,13.34 76.07,12.7 77.09,12.7 77.09,13.08 76.45,13.08 76.45,14.35 77.09,14.35 77.09,14.61 76.2,14.61 76.2,17.65 76.45,17.91 79.63,17.91 79.63,19.43 74.17,19.43 74.17,15.49
2.8V2
  Top 0.254: R17.2 32.91,32.09 Q6.1 34.48,30.8 35.31,29.97 35.31,28.32 34.48,27.49 Q5.1
  pour Top: 22.61,28.96 22.61,26.8 29.08,26.8 29.08,26.16 30.1,26.16 30.1,26.54 29.46,26.54 29.46,27.81 30.1,27.81 30.1,28.07 29.21,28.07 29.21,31.11 29.46,31.37 32.64,31.37 32.64,32.89 27.18,32.89 27.18,28.96
2.8V3
  Top 0.254: R25.2 79.9,32.09 Q8.1 81.47,30.8 82.3,29.97 82.3,28.32 81.47,27.49 Q7.1
  pour Top: 69.6,28.96 69.6,26.8 76.07,26.8 76.07,26.16 77.09,26.16 77.09,26.54 76.45,26.54 76.45,27.81 77.09,27.81 77.09,28.07 76.2,28.07 76.2,31.11 76.45,31.37 79.63,31.37 79.63,32.89 74.17,32.89 74.17,28.96
2.8V4
  Top 0.254: R33.2 32.91,45.55 Q10.1 34.48,44.26 35.31,43.43 35.31,41.78 34.48,40.95 Q9.1
  pour Top: 22.61,42.42 22.61,40.26 29.08,40.26 29.08,39.62 30.1,39.62 30.1,40.01 29.46,40.01 29.46,41.27 30.1,41.27 30.1,41.53 29.21,41.53 29.21,44.58 29.46,44.83 32.64,44.83 32.64,46.35 27.18,46.35 27.18,42.42
2.8V5
  Top 0.254: R41.2 79.9,45.55 Q12.1 81.47,44.26 82.3,43.43 82.3,41.78 81.47,40.95 Q11.1
  pour Top: 69.6,42.42 69.6,40.26 76.07,40.26 76.07,39.62 77.09,39.62 77.09,40.01 76.45,40.01 76.45,41.27 77.09,41.27 77.09,41.53 76.2,41.53 76.2,44.58 76.45,44.83 79.63,44.83 79.63,46.35 74.17,46.35 74.17,42.42
2.8V6
  Top 0.254: R49.2 32.91,59.02 Q14.1 34.48,57.72 35.31,56.9 35.31,55.24 34.48,54.42 Q13.1
  pour Top: 22.61,55.88 22.61,53.72 29.08,53.72 29.08,53.09 30.1,53.09 30.1,53.47 29.46,53.47 29.46,54.74 30.1,54.74 30.1,54.99 29.21,54.99 29.21,58.04 29.46,58.29 32.64,58.29 32.64,59.82 27.18,59.82 27.18,55.88
2.8V7
  Top 0.254: R57.2 79.9,59.02 Q16.1 81.47,57.72 82.3,56.9 82.3,55.24 81.47,54.42 Q15.1
  pour Top: 69.6,55.88 69.6,53.72 76.07,53.72 76.07,53.09 77.09,53.09 77.09,53.47 76.45,53.47 76.45,54.74 77.09,54.74 77.09,54.99 76.2,54.99 76.2,58.04 76.45,58.29 79.63,58.29 79.63,59.82 74.17,59.82 74.17,55.88
2.8V8
  Top 0.254: R65.2 32.91,72.48 Q18.1 34.48,71.18 35.31,70.36 35.31,68.71 34.48,67.88 Q17.1
  pour Top: 22.61,69.34 22.61,67.18 29.08,67.18 29.08,66.55 30.1,66.55 30.1,66.93 29.46,66.93 29.46,68.2 30.1,68.2 30.1,68.45 29.21,68.45 29.21,71.5 29.46,71.75 32.64,71.75 32.64,73.28 27.18,73.28 27.18,69.34
2.8V9
  Top 0.254: R73.2 79.9,72.48 Q20.1 81.47,71.18 82.3,70.36 82.3,68.71 81.47,67.88 Q19.1
  pour Top: 69.6,69.34 69.6,67.18 76.07,67.18 76.07,66.55 77.09,66.55 77.09,66.93 76.45,66.93 76.45,68.2 77.09,68.2 77.09,68.45 76.2,68.45 76.2,71.5 76.45,71.75 79.63,71.75 79.63,73.28 74.17,73.28 74.17,69.34
2.8V10
  Top 0.254: R81.2 32.91,85.94 Q22.1 34.48,84.64 35.31,83.82 35.31,82.17 34.48,81.34 Q21.1
  pour Top: 22.61,82.8 22.61,80.64 29.08,80.64 29.08,80.01 30.1,80.01 30.1,80.39 29.46,80.39 29.46,81.66 30.1,81.66 30.1,81.92 29.21,81.92 29.21,84.96 29.46,85.22 32.64,85.22 32.64,86.74 27.18,86.74 27.18,82.8
2.8V11
  Top 0.254: R89.2 79.9,85.94 Q24.1 81.47,84.64 82.3,83.82 82.3,82.17 81.47,81.34 Q23.1
  pour Top: 69.6,82.8 69.6,80.64 76.07,80.64 76.07,80.01 77.09,80.01 77.09,80.39 76.45,80.39 76.45,81.66 77.09,81.66 77.09,81.92 76.2,81.92 76.2,84.96 76.45,85.22 79.63,85.22 79.63,86.74 74.17,86.74 74.17,82.8
GND  (via drill 0.51)
  other vias: 39.12,10.03 19.3,18.41 39.75,17.02 28.83,11.81
  pour Top (rank 6): 16.51,19.86 45.51,19.86 45.51,6.86 16.51,6.86
  pour Bottom: 16.51,19.86 45.51,19.86 45.51,6.86 16.51,6.86
GND1  (via drill 0.51)
  other vias: 86.11,10.03 66.29,18.41 86.74,17.02 75.82,11.81
  pour Top (rank 6): 63.5,19.86 92.5,19.86 92.5,6.86 63.5,6.86
  pour Bottom: 63.5,19.86 92.5,19.86 92.5,6.86 63.5,6.86
GND2  (via drill 0.51)
  other vias: 39.12,23.5 19.3,31.88 39.75,30.48 28.83,25.27
  pour Top (rank 6): 16.51,33.32 45.51,33.32 45.51,20.32 16.51,20.32
  pour Bottom: 16.51,33.32 45.51,33.32 45.51,20.32 16.51,20.32
GND3  (via drill 0.51)
  other vias: 86.11,23.5 66.29,31.88 86.74,30.48 75.82,25.27
  pour Top (rank 6): 63.5,33.32 92.5,33.32 92.5,20.32 63.5,20.32
  pour Bottom: 63.5,33.32 92.5,33.32 92.5,20.32 63.5,20.32
GND4  (via drill 0.51)
  other vias: 39.12,36.96 19.3,45.34 39.75,43.94 28.83,38.73
  pour Top (rank 6): 16.51,46.78 45.51,46.78 45.51,33.78 16.51,33.78
  pour Bottom: 16.51,46.78 45.51,46.78 45.51,33.78 16.51,33.78
GND5  (via drill 0.51)
  other vias: 86.11,36.96 66.29,45.34 86.74,43.94 75.82,38.73
  pour Top (rank 6): 63.5,46.78 92.5,46.78 92.5,33.78 63.5,33.78
  pour Bottom: 63.5,46.78 92.5,46.78 92.5,33.78 63.5,33.78
GND6  (via drill 0.51)
  other vias: 39.12,50.42 19.3,58.8 39.75,57.4 28.83,52.2
  pour Top (rank 6): 16.51,60.24 45.51,60.24 45.51,47.24 16.51,47.24
  pour Bottom: 16.51,60.24 45.51,60.24 45.51,47.24 16.51,47.24
GND7  (via drill 0.51)
  other vias: 86.11,50.42 66.29,58.8 86.74,57.4 75.82,52.2
  pour Top (rank 6): 63.5,60.24 92.5,60.24 92.5,47.24 63.5,47.24
  pour Bottom: 63.5,60.24 92.5,60.24 92.5,47.24 63.5,47.24
GND8  (via drill 0.51)
  other vias: 39.12,63.88 19.3,72.26 39.75,70.87 28.83,65.66
  pour Top (rank 6): 16.51,73.71 45.51,73.71 45.51,60.71 16.51,60.71
  pour Bottom: 16.51,73.71 45.51,73.71 45.51,60.71 16.51,60.71
GND9  (via drill 0.51)
  other vias: 86.11,63.88 66.29,72.26 86.74,70.87 75.82,65.66
  pour Top (rank 6): 63.5,73.71 92.5,73.71 92.5,60.71 63.5,60.71
  pour Bottom: 63.5,73.71 92.5,73.71 92.5,60.71 63.5,60.71
GND10  (via drill 0.51)
  other vias: 39.12,77.34 19.3,85.72 39.75,84.33 28.83,79.12
  pour Top (rank 6): 16.51,87.17 45.51,87.17 45.51,74.17 16.51,74.17
  pour Bottom: 16.51,87.17 45.51,87.17 45.51,74.17 16.51,74.17
GND11  (via drill 0.51)
  other vias: 86.11,77.34 66.29,85.72 86.74,84.33 75.82,79.12
  pour Top (rank 6): 63.5,87.17 92.5,87.17 92.5,74.17 63.5,74.17
  pour Bottom: 63.5,87.17 92.5,87.17 92.5,74.17 63.5,74.17
GPIO0  (via drill 0.51)
  Top 0.203: R7.2 26.29,11.52 v26.29,12.32
  Bottom 0.203: v26.29,12.32 26.29,9.04 JP1.5
GPIO1
  Top 0.203: R8.2 22.64,10.14 JP1.6
GPIO2  (via drill 0.51)
  Top 0.203: R15.2 73.28,11.52 v73.28,12.32
  Bottom 0.203: v73.28,12.32 73.28,9.04 JP2.5
GPIO3
  Top 0.203: R16.2 69.64,10.14 JP2.6
GPIO4  (via drill 0.51)
  Top 0.203: R23.2 26.29,24.98 v26.29,25.78
  Bottom 0.203: v26.29,25.78 26.29,22.5 JP3.5
GPIO5
  Top 0.203: R24.2 22.64,23.61 JP3.6
GPIO6  (via drill 0.51)
  Top 0.203: R31.2 73.28,24.98 v73.28,25.78
  Bottom 0.203: v73.28,25.78 73.28,22.5 JP4.5
GPIO7
  Top 0.203: R32.2 69.64,23.61 JP4.6
GPIO8  (via drill 0.51)
  Top 0.203: R39.2 26.29,38.44 v26.29,39.24
  Bottom 0.203: v26.29,39.24 26.29,35.96 JP5.5
GPIO9
  Top 0.203: R40.2 22.64,37.07 JP5.6
GPIO10  (via drill 0.51)
  Top 0.203: R47.2 73.28,38.44 v73.28,39.24
  Bottom 0.203: v73.28,39.24 73.28,35.96 JP6.5
GPIO11
  Top 0.203: R48.2 69.64,37.07 JP6.6
GPIO12  (via drill 0.51)
  Top 0.203: R55.2 26.29,51.9 v26.29,52.7
  Bottom 0.203: v26.29,52.7 26.29,49.42 JP7.5
GPIO13
  Top 0.203: R56.2 22.64,50.53 JP7.6
GPIO14  (via drill 0.51)
  Top 0.203: R63.2 73.28,51.9 v73.28,52.7
  Bottom 0.203: v73.28,52.7 73.28,49.42 JP8.5
GPIO15
  Top 0.203: R64.2 69.64,50.53 JP8.6
GPIO16  (via drill 0.51)
  Top 0.203: R71.2 26.29,65.37 v26.29,66.17
  Bottom 0.203: v26.29,66.17 26.29,62.89 JP9.5
GPIO17
  Top 0.203: R72.2 22.64,63.99 JP9.6
GPIO18  (via drill 0.51)
  Top 0.203: R79.2 73.28,65.37 v73.28,66.17
  Bottom 0.203: v73.28,66.17 73.28,62.89 JP10.5
GPIO19
  Top 0.203: R80.2 69.64,63.99 JP10.6
GPIO20  (via drill 0.51)
  Top 0.203: R87.2 26.29,78.83 v26.29,79.63
  Bottom 0.203: v26.29,79.63 26.29,76.35 JP11.5
GPIO21
  Top 0.203: R88.2 22.64,77.45 JP11.6
GPIO22  (via drill 0.51)
  Top 0.203: R95.2 73.28,78.83 v73.28,79.63
  Bottom 0.203: v73.28,79.63 73.28,76.35 JP12.5
GPIO23
  Top 0.203: R96.2 69.64,77.45 JP12.6
N$1
  Top 0.203: R13.2 86.86,15.53 SJ2.1
N$2
  Top 0.203: R6.2 39.87,15.53 SJ1.1
N$3
  Top 0.203: R5.2 39.87,13.93 SJ1.3
N$4
  Top 0.203: R12.2 86.86,13.93 SJ2.3
N$5
  Top 0.203: U2.4 78.5,13.73 78.36,13.59 78.36,11.3 77.34,10.29 75.27,10.29 R15.1 74.51,12.45 R14.1
N$6
  Top 0.203: U2.1 79,11.31 77.47,9.78 72.39,9.78 71.33,10.83 R16.1 71.33,11.94 R11.1
N$7
  Top 0.203: R21.2 39.87,29 SJ3.1
N$8
  Top 0.203: R20.2 39.87,27.39 SJ3.3
N$9
  Top 0.203: U5.4 31.51,27.2 31.37,27.05 31.37,24.77 30.35,23.75 28.28,23.75 R23.1 27.52,25.91 R22.1
N$10
  Top 0.203: U5.1 32.01,24.77 30.48,23.24 25.4,23.24 24.34,24.3 R24.1 24.34,25.4 R19.1
N$11
  Top 0.203: R29.2 86.86,29 SJ4.1
N$12
  Top 0.203: R28.2 86.86,27.39 SJ4.3
N$13
  Top 0.203: U7.4 78.5,27.2 78.36,27.05 78.36,24.77 77.34,23.75 75.27,23.75 R31.1 74.51,25.91 R30.1
N$14
  Top 0.203: U7.1 79,24.77 77.47,23.24 72.39,23.24 71.33,24.3 R32.1 71.33,25.4 R27.1
N$15
  Top 0.203: R37.2 39.87,42.46 SJ5.1
N$16
  Top 0.203: R36.2 39.87,40.85 SJ5.3
N$17
  Top 0.203: U9.4 31.51,40.66 31.37,40.51 31.37,38.23 30.35,37.21 28.28,37.21 R39.1 27.52,39.37 R38.1
N$18
  Top 0.203: U9.1 32.01,38.23 30.48,36.7 25.4,36.7 24.34,37.76 R40.1 24.34,38.86 R35.1
N$19
  Top 0.203: R45.2 86.86,42.46 SJ6.1
N$20
  Top 0.203: R44.2 86.86,40.85 SJ6.3
N$21
  Top 0.203: U11.4 78.5,40.66 78.36,40.51 78.36,38.23 77.34,37.21 75.27,37.21 R47.1 74.51,39.37 R46.1
N$22
  Top 0.203: U11.1 79,38.23 77.47,36.7 72.39,36.7 71.33,37.76 R48.1 71.33,38.86 R43.1
N$23
  Top 0.203: R53.2 39.87,55.92 SJ7.1
N$24
  Top 0.203: R52.2 39.87,54.32 SJ7.3
N$25
  Top 0.203: U13.4 31.51,54.12 31.37,53.98 31.37,51.69 30.35,50.67 28.28,50.67 R55.1 27.52,52.83 R54.1
N$26
  Top 0.203: U13.1 32.01,51.7 30.48,50.16 25.4,50.16 24.34,51.22 R56.1 24.34,52.32 R51.1
N$27
  Top 0.203: R61.2 86.86,55.92 SJ8.1
N$28
  Top 0.203: R60.2 86.86,54.32 SJ8.3
N$29
  Top 0.203: U15.4 78.5,54.12 78.36,53.98 78.36,51.69 77.34,50.67 75.27,50.67 R63.1 74.51,52.83 R62.1
N$30
  Top 0.203: U15.1 79,51.7 77.47,50.16 72.39,50.16 71.33,51.22 R64.1 71.33,52.32 R59.1
N$31
  Top 0.203: R69.2 39.87,69.38 SJ9.1
N$32
  Top 0.203: R68.2 39.87,67.78 SJ9.3
N$33
  Top 0.203: U17.4 31.51,67.58 31.37,67.44 31.37,65.15 30.35,64.14 28.28,64.14 R71.1 27.52,66.29 R70.1
N$34
  Top 0.203: U17.1 32.01,65.16 30.48,63.63 25.4,63.63 24.34,64.68 R72.1 24.34,65.79 R67.1
N$35
  Top 0.203: R77.2 86.86,69.38 SJ10.1
N$36
  Top 0.203: R76.2 86.86,67.78 SJ10.3
N$37
  Top 0.203: U19.4 78.5,67.58 78.36,67.44 78.36,65.15 77.34,64.14 75.27,64.14 R79.1 74.51,66.29 R78.1
N$38
  Top 0.203: U19.1 79,65.16 77.47,63.63 72.39,63.63 71.33,64.68 R80.1 71.33,65.79 R75.1
N$39
  Top 0.203: R85.2 39.87,82.84 SJ11.1
N$40
  Top 0.203: R84.2 39.87,81.24 SJ11.3
N$41
  Top 0.203: U21.4 31.51,81.04 31.37,80.9 31.37,78.61 30.35,77.6 28.28,77.6 R87.1 27.52,79.76 R86.1
N$42
  Top 0.203: U21.1 32.01,78.62 30.48,77.09 25.4,77.09 24.34,78.14 R88.1 24.34,79.25 R83.1
N$43
  Top 0.203: R93.2 86.86,82.84 SJ12.1
N$44
  Top 0.203: R92.2 86.86,81.24 SJ12.3
N$45
  Top 0.203: U23.4 78.5,81.04 78.36,80.9 78.36,78.61 77.34,77.6 75.27,77.6 R95.1 74.51,79.76 R94.1
N$46
  Top 0.203: U23.1 79,78.62 77.47,77.09 72.39,77.09 71.33,78.14 R96.1 71.33,79.25 R91.1
N$100
  Top 0.203: U1.4 31.51,13.73 31.37,13.59 31.37,11.3 30.35,10.29 28.28,10.29 R7.1 27.52,12.45 R1.1
N$103
  Top 0.203: U1.1 32.01,11.31 30.48,9.78 25.4,9.78 24.34,10.83 R8.1 24.34,11.94 R4.1
SCL
  Top 0.203: R5.1 37.25,13.08 Q1.3 36.41,12.66 33.53,9.78 31.39,9.78 JP1.4
SCL1
  Top 0.203: R12.1 84.24,13.08 Q3.3 83.4,12.66 80.52,9.78 78.38,9.78 JP2.4
SCL2
  Top 0.203: R20.1 37.25,26.54 Q5.3 36.41,26.12 33.53,23.24 31.39,23.24 JP3.4
SCL3
  Top 0.203: R28.1 84.24,26.54 Q7.3 83.4,26.12 80.52,23.24 78.38,23.24 JP4.4
SCL4
  Top 0.203: R36.1 37.25,40.01 Q9.3 36.41,39.58 33.53,36.7 31.39,36.7 JP5.4
SCL5
  Top 0.203: R44.1 84.24,40.01 Q11.3 83.4,39.58 80.52,36.7 78.38,36.7 JP6.4
SCL6
  Top 0.203: R52.1 37.25,53.47 Q13.3 36.41,53.04 33.53,50.16 31.39,50.16 JP7.4
SCL7
  Top 0.203: R60.1 84.24,53.47 Q15.3 83.4,53.04 80.52,50.16 78.38,50.16 JP8.4
SCL8
  Top 0.203: R68.1 37.25,66.93 Q17.3 36.41,66.5 33.53,63.63 31.39,63.63 JP9.4
SCL9
  Top 0.203: R76.1 84.24,66.93 Q19.3 83.4,66.5 80.52,63.63 78.38,63.63 JP10.4
SCL10
  Top 0.203: R84.1 37.25,80.39 Q21.3 36.41,79.97 33.53,77.09 31.39,77.09 JP11.4
SCL11
  Top 0.203: R92.1 84.24,80.39 Q23.3 83.4,79.97 80.52,77.09 78.38,77.09 JP12.4
SCL_LV
  Top 0.254: R3.1 29.97,16.76 30.99,15.75 30.99,14.73 31.24,14.48 31.25,14.48 U1.5 32.51,14.48 32.89,14.1 32.89,12.45 33.21,12.13 Q1.2
SCL_LV1
  Top 0.254: R10.1 76.96,16.76 77.98,15.75 77.98,14.73 78.23,14.48 78.24,14.48 U2.5 79.5,14.48 79.88,14.1 79.88,12.45 80.2,12.13 Q3.2
SCL_LV2
  Top 0.254: R18.1 29.97,30.23 30.99,29.21 30.99,28.19 31.24,27.94 31.25,27.95 U5.5 32.51,27.95 32.89,27.56 32.89,25.91 33.21,25.59 Q5.2
SCL_LV3
  Top 0.254: R26.1 76.96,30.23 77.98,29.21 77.98,28.19 78.23,27.94 78.24,27.95 U7.5 79.5,27.95 79.88,27.56 79.88,25.91 80.2,25.59 Q7.2
SCL_LV4
  Top 0.254: R34.1 29.97,43.69 30.99,42.67 30.99,41.66 31.24,41.4 31.25,41.41 U9.5 32.51,41.41 32.89,41.02 32.89,39.37 33.21,39.05 Q9.2
SCL_LV5
  Top 0.254: R42.1 76.96,43.69 77.98,42.67 77.98,41.66 78.23,41.4 78.24,41.41 U11.5 79.5,41.41 79.88,41.02 79.88,39.37 80.2,39.05 Q11.2
SCL_LV6
  Top 0.254: R50.1 29.97,57.15 30.99,56.13 30.99,55.12 31.24,54.86 31.25,54.87 U13.5 32.51,54.87 32.89,54.48 32.89,52.83 33.21,52.52 Q13.2
SCL_LV7
  Top 0.254: R58.1 76.96,57.15 77.98,56.13 77.98,55.12 78.23,54.86 78.24,54.87 U15.5 79.5,54.87 79.88,54.48 79.88,52.83 80.2,52.52 Q15.2
SCL_LV8
  Top 0.254: R66.1 29.97,70.61 30.99,69.6 30.99,68.58 31.24,68.33 31.25,68.33 U17.5 32.51,68.33 32.89,67.94 32.89,66.29 33.21,65.98 Q17.2
SCL_LV9
  Top 0.254: R74.1 76.96,70.61 77.98,69.6 77.98,68.58 78.23,68.33 78.24,68.33 U19.5 79.5,68.33 79.88,67.94 79.88,66.29 80.2,65.98 Q19.2
SCL_LV10
  Top 0.254: R82.1 29.97,84.07 30.99,83.06 30.99,82.04 31.24,81.79 31.25,81.79 U21.5 32.51,81.79 32.89,81.41 32.89,79.76 33.21,79.44 Q21.2
SCL_LV11
  Top 0.254: R90.1 76.96,84.07 77.98,83.06 77.98,82.04 78.23,81.79 78.24,81.79 U23.5 79.5,81.79 79.88,81.41 79.88,79.76 80.2,79.44 Q23.2
SDA  (via drill 0.51)
  Top 0.203: R6.1 37.25,16.38 Q2.3 36.32,16.3 v36.32,15.11 | v36.32,11.18 34.54,9.4 33.91,9.4 32.64,8.13 JP1.3
  Bottom 0.203: v36.32,11.18 v36.32,15.11
SDA1  (via drill 0.51)
  Top 0.203: R13.1 84.24,16.38 Q4.3 83.31,16.3 v83.31,15.11 | v83.31,11.18 81.53,9.4 80.9,9.4 79.63,8.13 JP2.3
  Bottom 0.203: v83.31,11.18 v83.31,15.11
SDA2  (via drill 0.51)
  Top 0.203: R21.1 37.25,29.84 Q6.3 36.32,29.76 v36.32,28.57 | v36.32,24.64 34.54,22.86 33.91,22.86 32.64,21.59 JP3.3
  Bottom 0.203: v36.32,24.64 v36.32,28.57
SDA3  (via drill 0.51)
  Top 0.203: R29.1 84.24,29.84 Q8.3 83.31,29.76 v83.31,28.57 | v83.31,24.64 81.53,22.86 80.9,22.86 79.63,21.59 JP4.3
  Bottom 0.203: v83.31,24.64 v83.31,28.57
SDA4  (via drill 0.51)
  Top 0.203: R37.1 37.25,43.31 Q10.3 36.32,43.22 v36.32,42.04 | v36.32,38.1 34.54,36.32 33.91,36.32 32.64,35.05 JP5.3
  Bottom 0.203: v36.32,38.1 v36.32,42.04
SDA5  (via drill 0.51)
  Top 0.203: R45.1 84.24,43.31 Q12.3 83.31,43.22 v83.31,42.04 | v83.31,38.1 81.53,36.32 80.9,36.32 79.63,35.05 JP6.3
  Bottom 0.203: v83.31,38.1 v83.31,42.04
SDA6  (via drill 0.51)
  Top 0.203: R53.1 37.25,56.77 Q14.3 36.32,56.69 v36.32,55.5 | v36.32,51.56 34.54,49.78 33.91,49.78 32.64,48.51 JP7.3
  Bottom 0.203: v36.32,51.56 v36.32,55.5
SDA7  (via drill 0.51)
  Top 0.203: R61.1 84.24,56.77 Q16.3 83.31,56.69 v83.31,55.5 | v83.31,51.56 81.53,49.78 80.9,49.78 79.63,48.51 JP8.3
  Bottom 0.203: v83.31,51.56 v83.31,55.5
SDA8  (via drill 0.51)
  Top 0.203: R69.1 37.25,70.23 Q18.3 36.32,70.15 v36.32,68.96 | v36.32,65.02 34.54,63.25 33.91,63.25 32.64,61.98 JP9.3
  Bottom 0.203: v36.32,65.02 v36.32,68.96
SDA9  (via drill 0.51)
  Top 0.203: R77.1 84.24,70.23 Q20.3 83.31,70.15 v83.31,68.96 | v83.31,65.02 81.53,63.25 80.9,63.25 79.63,61.98 JP10.3
  Bottom 0.203: v83.31,65.02 v83.31,68.96
SDA10  (via drill 0.51)
  Top 0.203: R85.1 37.25,83.69 Q22.3 36.32,83.61 v36.32,82.42 | v36.32,78.49 34.54,76.71 33.91,76.71 32.64,75.44 JP11.3
  Bottom 0.203: v36.32,78.49 v36.32,82.42
SDA11  (via drill 0.51)
  Top 0.203: R93.1 84.24,83.69 Q24.3 83.31,83.61 v83.31,82.42 | v83.31,78.49 81.53,76.71 80.9,76.71 79.63,75.44 JP12.3
  Bottom 0.203: v83.31,78.49 v83.31,82.42
SDA_LV
  Top 0.254: R2.1 U1.6 34.21,15.23 Q2.2
SDA_LV1
  Top 0.254: R9.1 U2.6 81.2,15.23 Q4.2
SDA_LV2
  Top 0.254: R17.1 U5.6 34.21,28.7 Q6.2
SDA_LV3
  Top 0.254: R25.1 U7.6 81.2,28.7 Q8.2
SDA_LV4
  Top 0.254: R33.1 U9.6 34.21,42.16 Q10.2
SDA_LV5
  Top 0.254: R41.1 U11.6 81.2,42.16 Q12.2
SDA_LV6
  Top 0.254: R49.1 U13.6 34.21,55.62 Q14.2
SDA_LV7
  Top 0.254: R57.1 U15.6 81.2,55.62 Q16.2
SDA_LV8
  Top 0.254: R65.1 U17.6 34.21,69.08 Q18.2
SDA_LV9
  Top 0.254: R73.1 U19.6 81.2,69.08 Q20.2
SDA_LV10
  Top 0.254: R81.1 U21.6 34.21,82.54 Q22.2
SDA_LV11
  Top 0.254: R89.1 U23.6 81.2,82.54 Q24.2
VCC  (via drill 0.51)
  Top 0.203: SJ1.2 41.02,14.73 41.15,14.61 41.15,13.21 39.12,11.18 37.82,11.18 34.78,8.13 JP1.2
  Bottom 0.305: JP1.2 34.82,10.65 30.61,14.86 22.99,14.86 v20.95,16.89
  pour Top (rank 2): 20.07,14.99 21.46,14.99 21.46,13.84 20.32,13.84 20.32,13.34 21.84,13.34 21.84,13.84 23.75,13.84 23.75,17.78 20.07,17.78
VCC1  (via drill 0.51)
  Top 0.203: SJ2.2 88.01,14.73 88.14,14.61 88.14,13.21 86.11,11.18 84.81,11.18 81.77,8.13 JP2.2
  Bottom 0.305: JP2.2 81.81,10.65 77.6,14.86 69.98,14.86 v67.94,16.89
  pour Top (rank 2): 67.06,14.99 68.45,14.99 68.45,13.84 67.31,13.84 67.31,13.34 68.83,13.34 68.83,13.84 70.74,13.84 70.74,17.78 67.06,17.78
VCC2  (via drill 0.51)
  Top 0.203: SJ3.2 41.02,28.19 41.15,28.07 41.15,26.67 39.12,24.64 37.82,24.64 34.78,21.59 JP3.2
  Bottom 0.305: JP3.2 34.82,24.11 30.61,28.32 22.99,28.32 v20.95,30.35
  pour Top (rank 2): 20.07,28.45 21.46,28.45 21.46,27.3 20.32,27.3 20.32,26.8 21.84,26.8 21.84,27.3 23.75,27.3 23.75,31.24 20.07,31.24
VCC3  (via drill 0.51)
  Top 0.203: SJ4.2 88.01,28.19 88.14,28.07 88.14,26.67 86.11,24.64 84.81,24.64 81.77,21.59 JP4.2
  Bottom 0.305: JP4.2 81.81,24.11 77.6,28.32 69.98,28.32 v67.94,30.35
  pour Top (rank 2): 67.06,28.45 68.45,28.45 68.45,27.3 67.31,27.3 67.31,26.8 68.83,26.8 68.83,27.3 70.74,27.3 70.74,31.24 67.06,31.24
VCC4  (via drill 0.51)
  Top 0.203: SJ5.2 41.02,41.66 41.15,41.53 41.15,40.13 39.12,38.1 37.82,38.1 34.78,35.05 JP5.2
  Bottom 0.305: JP5.2 34.82,37.57 30.61,41.78 22.99,41.78 v20.95,43.81
  pour Top (rank 2): 20.07,41.91 21.46,41.91 21.46,40.77 20.32,40.77 20.32,40.26 21.84,40.26 21.84,40.77 23.75,40.77 23.75,44.7 20.07,44.7
VCC5  (via drill 0.51)
  Top 0.203: SJ6.2 88.01,41.66 88.14,41.53 88.14,40.13 86.11,38.1 84.81,38.1 81.77,35.05 JP6.2
  Bottom 0.305: JP6.2 81.81,37.57 77.6,41.78 69.98,41.78 v67.94,43.81
  pour Top (rank 2): 67.06,41.91 68.45,41.91 68.45,40.77 67.31,40.77 67.31,40.26 68.83,40.26 68.83,40.77 70.74,40.77 70.74,44.7 67.06,44.7
VCC6  (via drill 0.51)
  Top 0.203: SJ7.2 41.02,55.12 41.15,54.99 41.15,53.59 39.12,51.56 37.82,51.56 34.78,48.51 JP7.2
  Bottom 0.305: JP7.2 34.82,51.03 30.61,55.24 22.99,55.24 v20.95,57.28
  pour Top (rank 2): 20.07,55.37 21.46,55.37 21.46,54.23 20.32,54.23 20.32,53.72 21.84,53.72 21.84,54.23 23.75,54.23 23.75,58.17 20.07,58.17
VCC7  (via drill 0.51)
  Top 0.203: SJ8.2 88.01,55.12 88.14,54.99 88.14,53.59 86.11,51.56 84.81,51.56 81.77,48.51 JP8.2
  Bottom 0.305: JP8.2 81.81,51.03 77.6,55.24 69.98,55.24 v67.94,57.28
  pour Top (rank 2): 67.06,55.37 68.45,55.37 68.45,54.23 67.31,54.23 67.31,53.72 68.83,53.72 68.83,54.23 70.74,54.23 70.74,58.17 67.06,58.17
VCC8  (via drill 0.51)
  Top 0.203: SJ9.2 41.02,68.58 41.15,68.45 41.15,67.06 39.12,65.02 37.82,65.02 34.78,61.98 JP9.2
  Bottom 0.305: JP9.2 34.82,64.49 30.61,68.71 22.99,68.71 v20.95,70.74
  pour Top (rank 2): 20.07,68.83 21.46,68.83 21.46,67.69 20.32,67.69 20.32,67.18 21.84,67.18 21.84,67.69 23.75,67.69 23.75,71.63 20.07,71.63
VCC9  (via drill 0.51)
  Top 0.203: SJ10.2 88.01,68.58 88.14,68.45 88.14,67.06 86.11,65.02 84.81,65.02 81.77,61.98 JP10.2
  Bottom 0.305: JP10.2 81.81,64.49 77.6,68.71 69.98,68.71 v67.94,70.74
  pour Top (rank 2): 67.06,68.83 68.45,68.83 68.45,67.69 67.31,67.69 67.31,67.18 68.83,67.18 68.83,67.69 70.74,67.69 70.74,71.63 67.06,71.63
VCC10  (via drill 0.51)
  Top 0.203: SJ11.2 41.02,82.04 41.15,81.92 41.15,80.52 39.12,78.49 37.82,78.49 34.78,75.44 JP11.2
  Bottom 0.305: JP11.2 34.82,77.96 30.61,82.17 22.99,82.17 v20.95,84.2
  pour Top (rank 2): 20.07,82.3 21.46,82.3 21.46,81.15 20.32,81.15 20.32,80.64 21.84,80.64 21.84,81.15 23.75,81.15 23.75,85.09 20.07,85.09
VCC11  (via drill 0.51)
  Top 0.203: SJ12.2 88.01,82.04 88.14,81.92 88.14,80.52 86.11,78.49 84.81,78.49 81.77,75.44 JP12.2
  Bottom 0.305: JP12.2 81.81,77.96 77.6,82.17 69.98,82.17 v67.94,84.2
  pour Top (rank 2): 67.06,82.3 68.45,82.3 68.45,81.15 67.31,81.15 67.31,80.64 68.83,80.64 68.83,81.15 70.74,81.15 70.74,85.09 67.06,85.09

## Text on the board
Bottom: v10 | v10 | v10 | v10 | v10 | v10 | v10 | v10 | v10 | v10 | v10 | v10
Dimension: Route Out | Route Out | Route Out | Route Out | Route Out | Route Out | Route Out | Route Out | Route Out | Route Out | Route Out | Route Out | Route Out | Route Out | Route Out | Route Out | Route Out | Route Out | Route Out | Route Out | Route Out
tPlace: PU EN | PU EN | VL6180 TOF | Range Finder | VL6180 TOF | Range Finder | IO1 | IO0 | SCL | SDA | VCC | GND | IO1 | IO0 | SCL | SDA | VCC | GND | PU EN | PU EN | VL6180 TOF | Range Finder | VL6180 TOF | Range Finder | IO1 | IO0 | SCL | SDA | VCC | GND | IO1 | IO0 | SCL | SDA | VCC | GND | PU EN | PU EN | VL6180 TOF | Range Finder | VL6180 TOF | Range Finder | IO1 | IO0 | SCL | SDA | VCC | GND | IO1 | IO0 | SCL | SDA | VCC | GND | PU EN | PU EN | VL6180 TOF | Range Finder | VL6180 TOF | Range Finder | IO1 | IO0 | SCL | SDA | VCC | GND | IO1 | IO0 | SCL | SDA | VCC | GND | PU EN | PU EN | VL6180 TOF | Range Finder | VL6180 TOF | Range Finder | IO1 | IO0 | SCL | SDA | VCC | GND | IO1 | IO0 | SCL | SDA | VCC | GND | PU EN | PU EN | VL6180 TOF | Range Finder | VL6180 TOF | Range Finder | IO1 | IO0 | SCL | SDA | VCC | GND | IO1 | IO0 | SCL | SDA | VCC | GND
bPlace: Vl6180 Time of Flight Range Finder | Vl6180 Time of Flight Range Finder | IO1 | IO0 | SCL | SDA | VCC | GND | IO1 | IO0 | SCL | SDA | VCC | GND | Vl6180 Time of Flight Range Finder | Vl6180 Time of Flight Range Finder | IO1 | IO0 | SCL | SDA | VCC | GND | IO1 | IO0 | SCL | SDA | VCC | GND | Vl6180 Time of Flight Range Finder | Vl6180 Time of Flight Range Finder | IO1 | IO0 | SCL | SDA | VCC | GND | IO1 | IO0 | SCL | SDA | VCC | GND | Vl6180 Time of Flight Range Finder | Vl6180 Time of Flight Range Finder | IO1 | IO0 | SCL | SDA | VCC | GND | IO1 | IO0 | SCL | SDA | VCC | GND | Vl6180 Time of Flight Range Finder | Vl6180 Time of Flight Range Finder | IO1 | IO0 | SCL | SDA | VCC | GND | IO1 | IO0 | SCL | SDA | VCC | GND | Vl6180 Time of Flight Range Finder | Vl6180 Time of Flight Range Finder | IO1 | IO0 | SCL | SDA | VCC | GND | IO1 | IO0 | SCL | SDA | VCC | GND